# EAGLE board espcam (EAGLE 9.6.2)
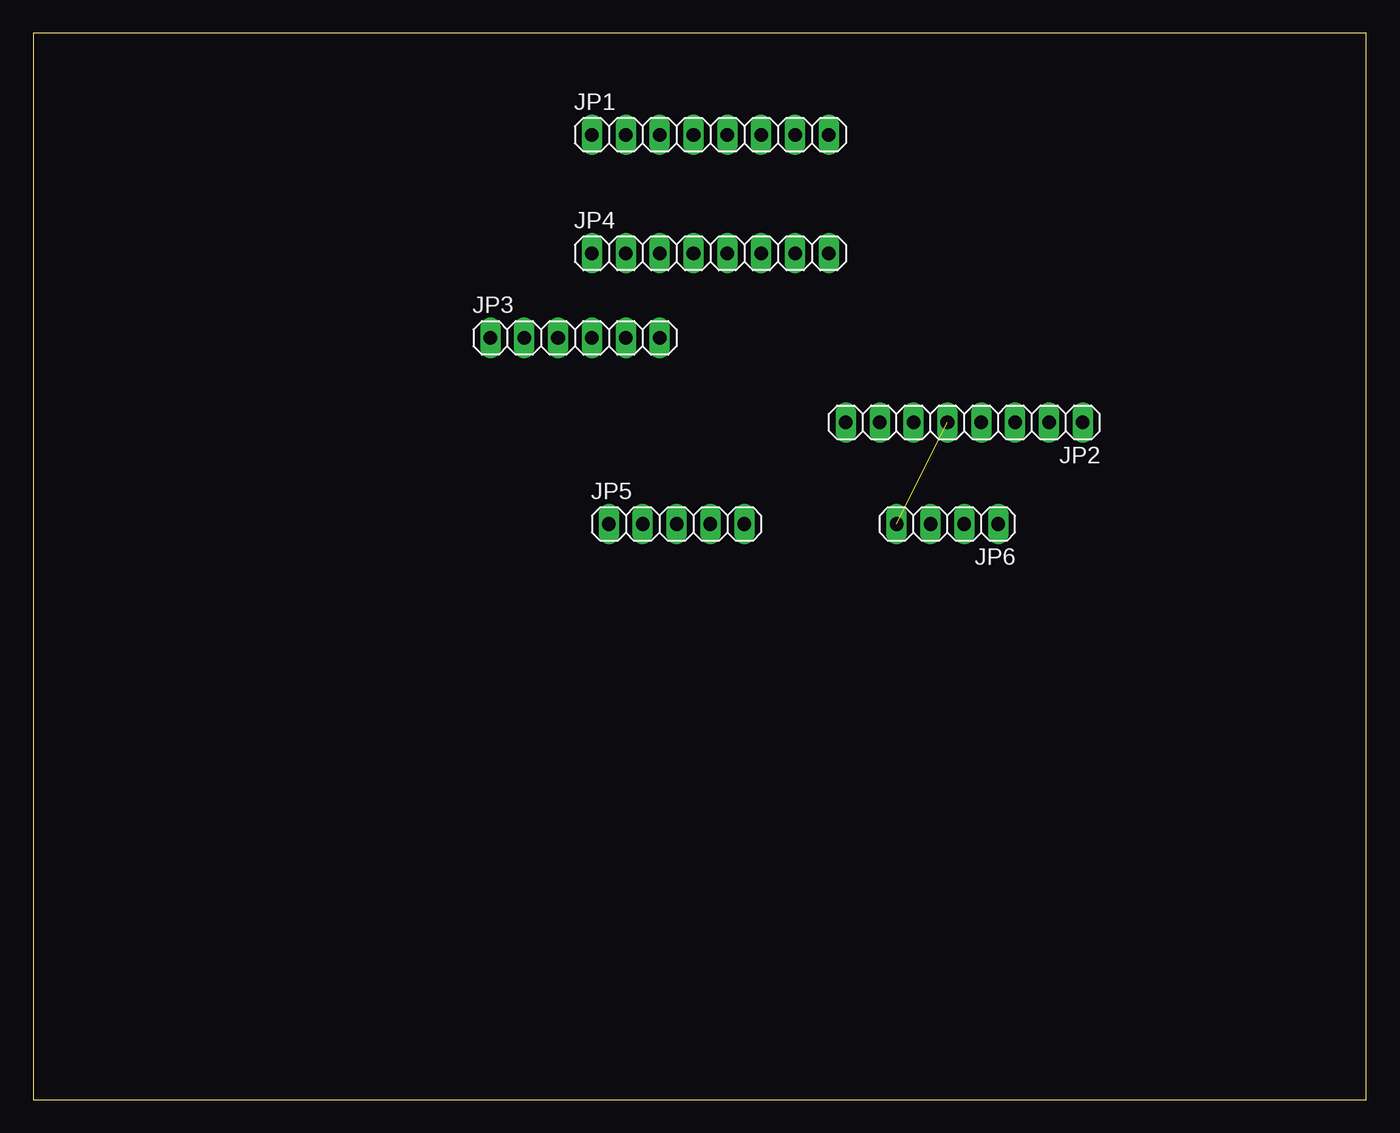
[diagram p0: board, top side]
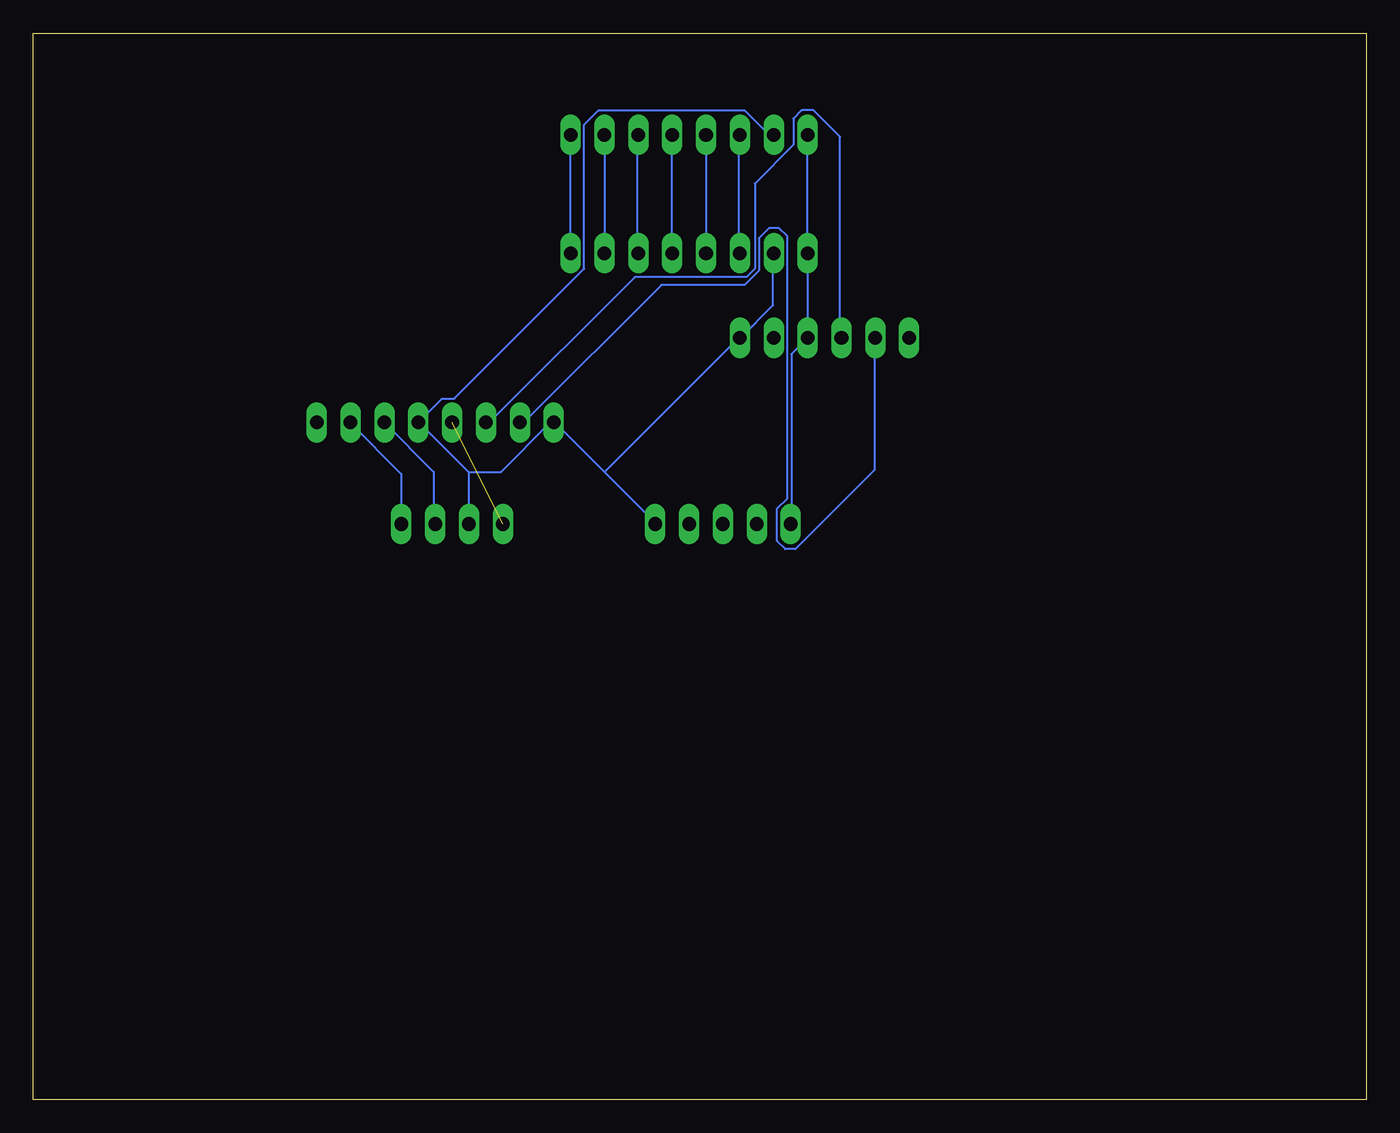
[diagram p1: board, bottom side, seen from below]

Size 100 x 80 mm. Coordinates in mm from the lower left corner, seen from the top.
Outline: 0,0 100,0 100,80 0,80 0,0
Copper layers (1*16): Top 0.035mm / dielectric 1.5mm / Bottom 0.035mm
Design rules "default": minimum track width 6mil, minimum drill 0.35mm, track to track 6mil, track to pad 6mil, pad to pad 6mil, via to via 6mil, smd to smd 6mil, copper to edge 40mil, drill to drill 6mil, minimum pad ring 10mil, minimum via ring 8mil, stop-mask expansion 4mil, vias tented up to drill 0mil, thermal gap 10mil

## Footprints (pad centres in the part's own frame; a part is rotated, then mirrored left to right if it is on the bottom)
1X08 = drill 1.016 long: 1 -8.89,0; 2 -6.35,0; 3 -3.81,0; 4 -1.27,0; 5 1.27,0; 6 3.81,0; 7 6.35,0; 8 8.89,0
1X06 = drill 1.016 long: 1 -6.35,0; 2 -3.81,0; 3 -1.27,0; 4 1.27,0; 5 3.81,0; 6 6.35,0
1X05 = drill 1.016 long: 1 -5.08,0; 2 -2.54,0; 3 0,0; 4 2.54,0; 5 5.08,0
1X04 = drill 1.016 long: 1 -3.81,0; 2 -1.27,0; 3 1.27,0; 4 3.81,0

## Placement (x,y rotation side)
JP1  [1X08]  50.8,72.39 0 top
JP2  [1X08]  69.85,50.8 180 top
JP3  [1X06]  40.64,57.15 0 top
JP4  [1X08]  50.8,63.5 0 top
JP5  [1X05]  48.26,43.18 0 top
JP6  [1X04]  68.58,43.18 180 top

## Library data of the parts
JP1-JP6 = pinhead

## Nets
3V3: JP2.1
5V: JP1.1 JP3.4 JP4.1 JP5.1
GND: JP1.2 JP2.4 JP2.8 JP3.6 JP4.2 JP5.5 JP6.3
IO0: JP2.3 JP6.2
IO2: JP1.7 JP4.7
IO4: JP1.8 JP4.8
IO12: JP1.3 JP4.3
IO13: JP1.4 JP4.4
IO14: JP1.6 JP4.6
IO15: JP1.5 JP4.5
IO16: JP2.2 JP6.1
RX: JP2.7 JP3.2
TX: JP2.6 JP3.3
VOUT: JP2.5 JP6.4

## Tracks (layer width: path | path; a pad name or v marks a point on that pad's centre or on a via)
5V
  Bottom 0.152: JP1.1 JP4.1 JP3.4 43.13,55.93 43.13,43.28 JP5.1
GND
  Bottom 0.152: JP4.2 44.5,63.4 44.5,59.59 46.94,57.15 JP3.6 47.09,57.15 57.15,47.09 | 57.15,47.09 60.96,50.9 JP2.8 60.96,50.75 61.27,50.75 64.92,47.09 67.36,47.09 | 57.15,47.09 53.34,43.28 JP5.5 | 67.36,47.09 67.36,43.28 JP6.3 | 67.36,47.09 71.02,50.75 JP2.4 69.34,52.58 68.43,52.58 58.67,62.33 58.67,73.15 57.61,74.22 46.63,74.22 44.81,72.39 JP1.2
IO0
  Bottom 0.152: JP2.3 69.95,47.09 69.95,43.28 JP6.2
IO2
  Bottom 0.152: JP1.7 JP4.7
IO4
  Bottom 0.152: JP4.8 59.74,63.55 59.74,72.39 JP1.8
IO12
  Bottom 0.152: JP4.3 47.09,63.55 47.09,72.39 JP1.3
IO13
  Bottom 0.152: JP1.4 JP4.4
IO14
  Bottom 0.152: JP4.6 54.71,63.55 54.71,72.39 JP1.6
IO15
  Bottom 0.152: JP4.5 52.12,63.55 52.12,72.39 JP1.5
IO16
  Bottom 0.152: JP6.1 72.39,46.94 76.2,50.75 JP2.2
RX
  Bottom 0.152: JP2.7 63.4,50.9 63.09,50.9 52.88,61.11 46.63,61.11 45.57,62.18 45.57,64.62 44.81,65.38 44.04,65.38 43.43,64.77 43.43,45.11 44.2,44.35 44.2,41.91 43.59,41.3 42.82,41.3 36.88,47.24 36.88,57.15 JP3.2
TX
  Bottom 0.152: JP2.6 65.99,50.9 65.68,50.9 54.86,61.72 46.48,61.72 45.87,62.33 45.87,68.73 42.98,71.63 42.98,73.61 42.37,74.22 41.45,74.22 39.47,72.24 39.47,57.15 JP3.3
VOUT  (1 unrouted)